# EAGLE board tascud ver01 (EAGLE 8.1.0)
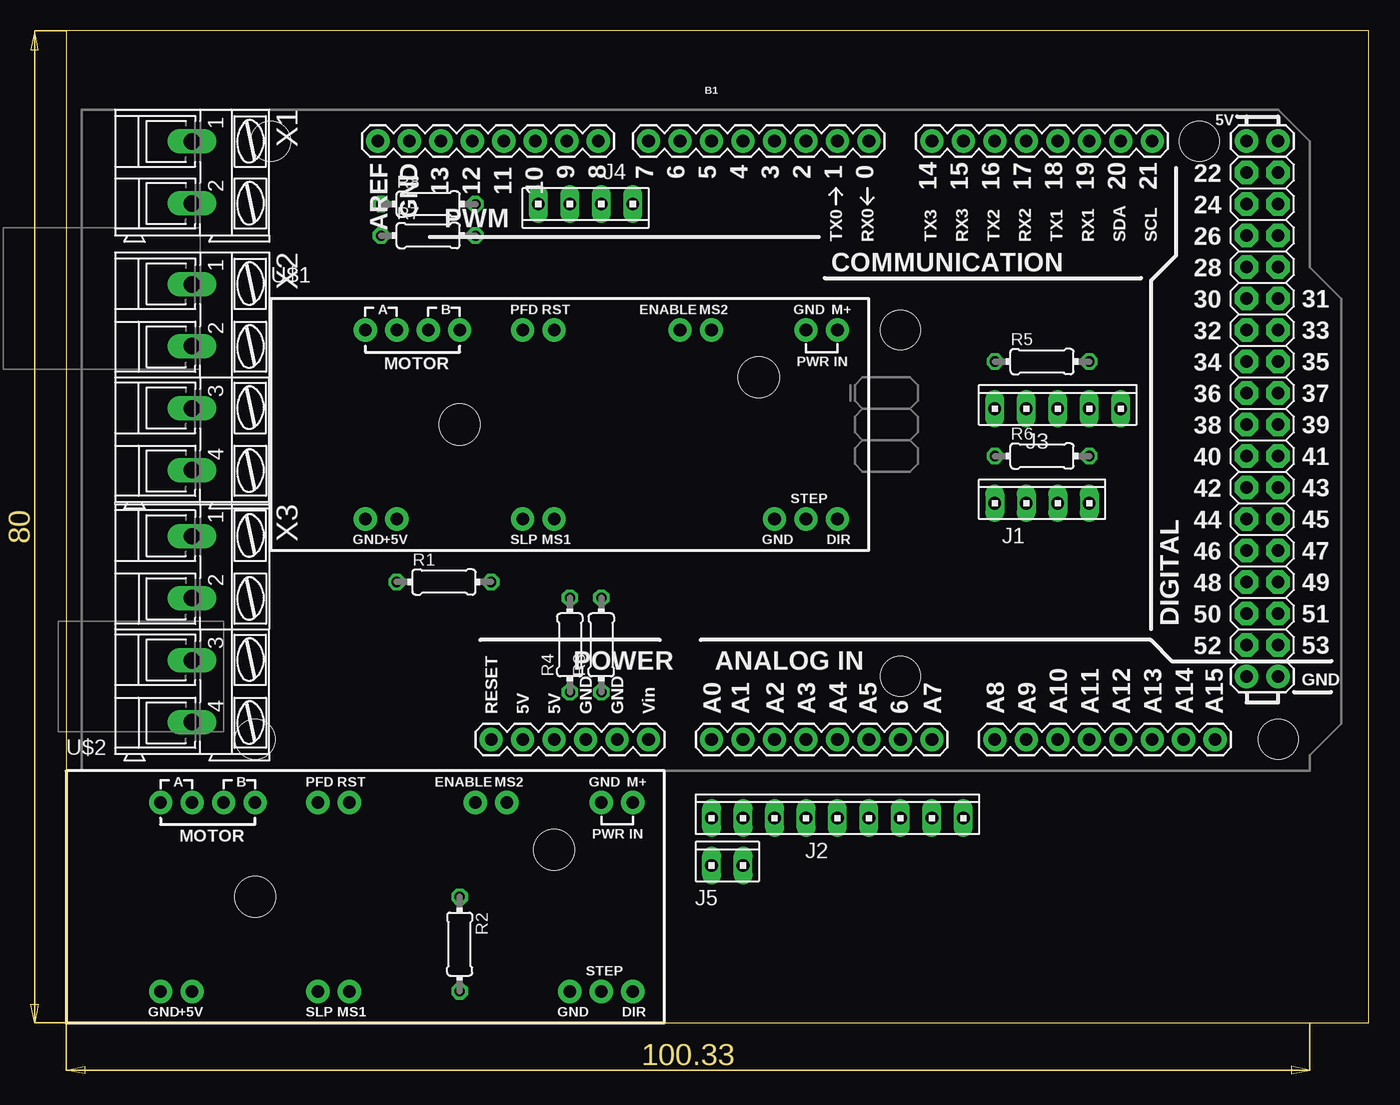
[diagram p0: board, top side]
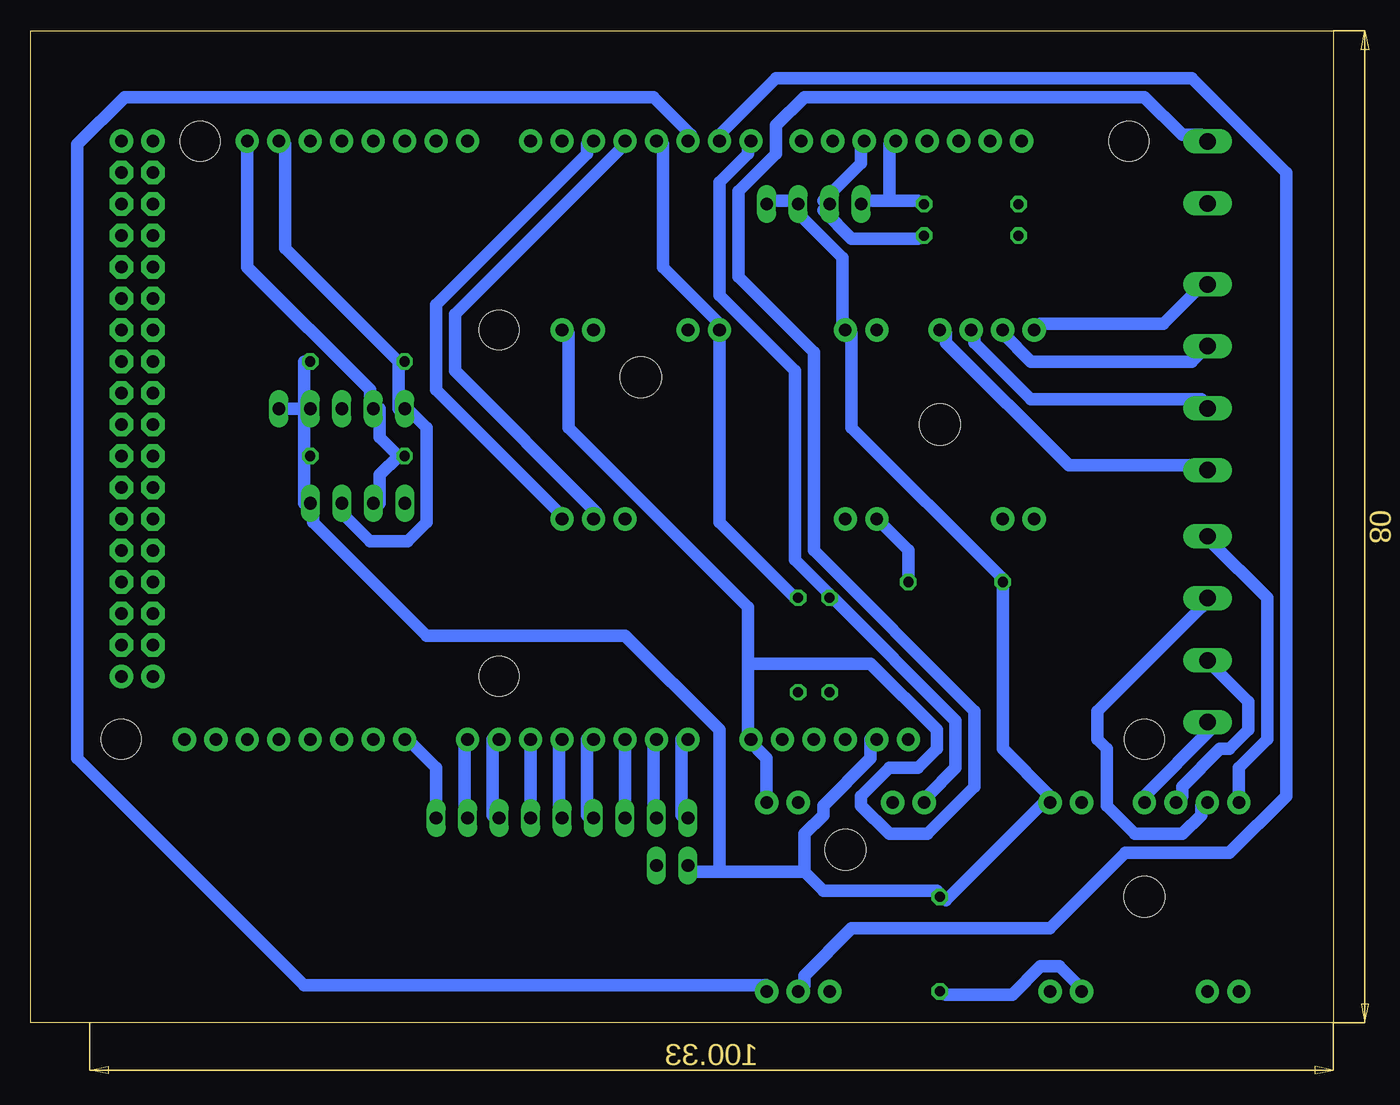
[diagram p1: board, bottom side, seen from below]

Size 105.08 x 80 mm. Coordinates in mm from the lower left corner, seen from the top.
Outline: 0,0 105.08,0 105.08,80 0,80 0,0
Copper layers (1*16): Top 0.035mm / dielectric 1.5mm / Bottom 0.035mm
Design rules "default *": minimum track width 40mil, minimum drill 24mil, track to track 20mil, track to pad 20mil, pad to pad 20mil, via to via 20mil, smd to smd 8mil, copper to edge 40mil, drill to drill 8mil, minimum pad ring 10mil, minimum via ring 8mil, stop-mask expansion 4mil, vias tented up to drill 0mil, thermal gap 10mil
Net classes: 0 default: width 0.635 mm, drill 0.381 mm, clearance 0.305 mm

## Footprints (pad centres in the part's own frame; a part is rotated, then mirrored left to right if it is on the bottom)
ARDUINO_MEGA = drill 1.016 pad 1.88: 0 13.97,24.13; 1 11.43,24.13; 2 8.89,24.13; 3 6.35,24.13; 3.3V -13.97,-24.13; 4 3.81,24.13; 5 1.27,24.13; 5V@0 -11.43,-24.13; 5V@1 44.45,24.13; 5V@2 46.99,24.13; 6 -1.27,24.13; 7 -3.81,24.13; 8 -7.874,24.13; 9 -10.414,24.13; 10 -12.954,24.13; 11 -15.494,24.13; 12 -18.034,24.13; 13 -20.574,24.13; 14 19.05,24.13; 15 21.59,24.13; 16 24.13,24.13; 17 26.67,24.13; 18 29.21,24.13; 19 31.75,24.13; 20 34.29,24.13; 21 36.83,24.13; A0 1.27,-24.13; A1 3.81,-24.13; A2 6.35,-24.13; A3 8.89,-24.13; A4 11.43,-24.13; A5 13.97,-24.13; A6 16.51,-24.13; A7 19.05,-24.13; A8 24.13,-24.13; A9 26.67,-24.13; A10 29.21,-24.13; A11 31.75,-24.13; A12 34.29,-24.13; A13 36.83,-24.13; A14 39.37,-24.13; A15 41.91,-24.13; AREF -25.654,24.13; GND@0 -8.89,-24.13; GND@1 -6.35,-24.13; GND@2 44.45,-19.05; GND@3 46.99,-19.05; GND@4 -23.114,24.13; RESET -16.51,-24.13; VIN -3.81,-24.13 | drill 1.016 pad 1.88 octagon: 22 44.45,21.59; 23 46.99,21.59; 24 44.45,19.05; 25 46.99,19.05; 26 44.45,16.51; 27 46.99,16.51; 28 44.45,13.97; 29 46.99,13.97; 30 44.45,11.43; 31 46.99,11.43; 32 44.45,8.89; 33 46.99,8.89; 34 44.45,6.35; 35 46.99,6.35; 36 44.45,3.81; 37 46.99,3.81; 38 44.45,1.27; 39 46.99,1.27; 40 44.45,-1.27; 41 46.99,-1.27; 42 44.45,-3.81; 43 46.99,-3.81; 44 44.45,-6.35; 45 46.99,-6.35; 46 44.45,-8.89; 47 46.99,-8.89; 48 44.45,-11.43; 49 46.99,-11.43; 50 44.45,-13.97; 51 46.99,-13.97; 52 44.45,-16.51; 53 46.99,-16.51 | hole 3.2: -34.29,24.13; -35.56,-24.13; 16.51,8.89; 16.51,-19.05; 40.64,24.13; 46.99,-24.13
10X04MTA = drill 1.016 long: 1 3.81,0; 2 1.27,0; 3 -1.27,0; 4 -3.81,0
10X09MTA = drill 1.016 long: 1 10.16,0; 2 7.62,0; 3 5.08,0; 4 2.54,0; 5 0,0; 6 -2.54,0; 7 -5.08,0; 8 -7.62,0; 9 -10.16,0
10X05MTA = drill 1.016 long: 1 5.08,0; 2 2.54,0; 3 0,0; 4 -2.54,0; 5 -5.08,0
10X02MTA = drill 1.016 long: 1 1.27,0; 2 -1.27,0
0204/7 = drill 0.813 octagon: 1 -3.81,0; 2 3.81,0
EASYDRIVER_V44 = drill 1.016 pad 1.88: A1 -16.51,7.62; A2 -13.97,7.62; B1 -8.89,7.62; B2 -11.43,7.62; DIR 21.59,-7.62; ENABLE 8.89,7.62; GND1 19.05,7.62; GND2 16.51,-7.62; GND3 -16.51,-7.62; M+ 21.59,7.62; MS1 -1.27,-7.62; MS2 11.43,7.62; P$11 -13.97,-7.62; PFD -3.81,7.62; RST -1.27,7.62; SLEEP -3.81,-7.62; STEP 19.05,-7.62 | hole 3.302: 15.24,3.81; -8.89,0
AK300/2 = drill 1.321 long: 1 -2.515,0; 2 2.489,0
AK300/4 = drill 1.321 long: 1 -7.493,0; 2 -2.515,0; 3 2.515,0; 4 7.493,0

## Placement (x,y rotation side)
B1  ARDUINO_MEGA_R3FULL  [ARDUINO_MEGA]  50.8,46.99 0 top
J1  [10X04MTA]  78.74,41.91 0 top
J2  [10X09MTA]  62.23,16.51 0 top
J3  [10X05MTA]  80.01,49.53 0 top
J4  [10X04MTA]  41.91,66.04 180 top
J5  [10X02MTA]  53.34,12.7 0 top
R1  1k  [0204/7]  30.48,35.56 0 top
R2  1k  [0204/7]  31.75,6.35 270 top
R3  1k  [0204/7]  43.18,30.48 90 top
R4  1k  [0204/7]  40.64,30.48 90 top
R5  1k  [0204/7]  78.74,53.34 0 top
R6  1k  [0204/7]  78.74,45.72 0 top
R7  1k  [0204/7]  29.21,63.5 0 top
R8  1k  [0204/7]  29.21,66.04 0 top
U$1  EASYDRIVER_V44  [EASYDRIVER_V44]  40.64,48.26 0 top
U$2  EASYDRIVER_V44  [EASYDRIVER_V44]  24.13,10.16 0 top
X1  [AK300/2]  10.16,68.58 270 top
X2  [AK300/4]  10.16,52.07 270 top
X3  [AK300/4]  10.16,31.75 270 top

## Library data of the parts
B1 = SparkFun-Boards
J1-J5 = con-amp
R1-R8 = rcl
U$1 U$2 = EasyDriver
X1-X3 = con-ptr500; OC_FARNELL: unknown; OC_NEWARK: unknown

## Nets
3.3V: B1.3.3V J1.1 J3.1 J3.2 J4.3 J4.4 J5.2 R1.1 R2.1 R5.2 R6.2 U$1.RST U$2.RST
12V: B1.VIN U$1.M+ U$2.M+ X1.1
N$1: B1.2 U$1.DIR
N$2: U$2.MS2
N$3: B1.4 R3.2 U$1.ENABLE
N$4: B1.5 U$2.DIR
N$5: B1.6 U$2.STEP
N$6: B1.7 R4.2 U$2.ENABLE
N$7: B1.A1 J2.8
N$8: B1.A2 J2.7
N$9: U$1.A1 X2.1
N$10: U$1.A2 X2.2
N$11: U$1.B2 X2.3
N$12: U$1.B1 X2.4
N$13: U$2.A1 X3.1
N$14: U$2.A2 X3.2
N$15: U$2.B2 X3.3
N$16: U$2.B1 X3.4
N$17: B1.3 U$1.STEP
N$18: B1.A7 J2.2
N$19: R2.2 U$2.SLEEP
N$20: R1.2 U$1.SLEEP
N$21: B1.A3 J2.6
N$22: B1.11 J4.1 R8.2
N$23: B1.A8 J2.1
N$24: B1.A4 J2.5
N$25: B1.A5 J2.4
N$26: B1.A0 J2.9
N$27: B1.A6 J2.3
N$28: U$2.GND1
N$36: B1.10 J4.2 R7.2
SCL: B1.21 J1.3 J3.4 R6.1
SDA: B1.20 J1.2 J3.5 R5.1

## Tracks (layer width: path | path; a pad name or v marks a point on that pad's centre or on a via)
3.3V
  Bottom 1.016: J4.4 45.72,66.29 43.43,66.29 J4.3 43.43,65.53 39.62,61.72 39.62,56.39 U$1.RST 38.86,55.63 38.86,48.01 26.67,35.81 R1.1 26.67,22.1 22.86,18.29 | 83.06,49.53 83.06,45.72 | 83.06,49.53 83.06,53.34 R5.2 | 83.06,45.72 83.06,41.91 J1.1 82.3,41.91 82.3,40.39 73.15,31.24 57.15,31.24 49.53,23.62 49.53,12.19 | 83.06,45.72 R6.2 | 83.06,49.53 J3.1 | 83.06,49.53 J3.2 | 22.86,18.29 31.24,9.91 R2.1 32,10.67 41.15,10.67 42.67,12.19 | 22.86,18.29 U$2.RST | 42.67,12.19 49.53,12.19 | 49.53,12.19 51.82,12.19 J5.2 | 42.67,12.19 42.67,15.24 41.15,16.76 41.15,17.53 37.34,21.34 37.34,22.86 B1.3.3V
12V
  Bottom 1.016: U$2.M+ 45.72,21.34 47.24,22.86 | 47.24,22.86 47.24,28.96 | 47.24,28.96 47.24,33.53 61.72,48.01 61.72,55.63 U$1.M+ | 47.24,22.86 B1.VIN | 47.24,28.96 37.34,28.96 32,23.62 32,22.1 33.53,20.57 35.81,20.57 38.1,18.29 38.1,17.53 35.81,15.24 32.77,15.24 28.96,19.05 28.96,25.15 41.91,38.1 41.91,54.1 48.01,60.2 48.01,67.06 44.96,70.1 44.96,72.39 42.67,74.68 15.24,74.68 12.19,71.63 10.67,71.63 X1.1
N$1
  Bottom 1.016: B1.2 60.2,70.87 60.2,70.1 72.39,57.91 72.39,51.05 62.48,41.15 U$1.DIR
N$3
  Bottom 1.016: R3.2 43.43,34.29 49.53,40.39 U$1.ENABLE 49.53,56.39 54.1,60.96 54.1,70.87 B1.4
N$4
  Bottom 1.016: U$2.DIR 45.72,3.05 83.06,3.05 101.35,21.34 101.35,70.87 97.54,74.68 54.86,74.68 51.82,71.63 B1.5
N$5
  Bottom 1.016: U$2.STEP 42.67,3.05 42.67,3.81 38.86,7.62 22.86,7.62 16.76,13.72 8.38,13.72 3.81,18.29 3.81,68.58 11.43,76.2 44.96,76.2 49.53,71.63 B1.6
N$6
  Bottom 1.016: 40.39,34.29 30.48,24.38 30.48,20.57 32.77,18.29 U$2.ENABLE | 40.39,34.29 43.43,37.34 43.43,52.58 49.53,58.67 49.53,67.82 47.24,70.1 47.24,70.87 B1.7 | 40.39,34.29 R4.2
N$7
  Bottom 1.016: J2.8 54.86,16.76 54.86,22.86 B1.A1
N$8
  Bottom 1.016: B1.A2 J2.7
N$9
  Bottom 1.016: U$1.A1 23.62,56.39 13.72,56.39 10.67,59.44 X2.1
N$10
  Bottom 1.016: U$1.A2 26.67,55.63 24.38,53.34 11.43,53.34 10.67,54.1 X2.2
N$11
  Bottom 1.016: U$1.B2 28.96,55.63 28.96,54.86 24.38,50.29 10.67,50.29 X2.3
N$12
  Bottom 1.016: U$1.B1 31.24,55.63 31.24,54.86 21.34,44.96 10.67,44.96 X2.4
N$13
  Bottom 1.016: U$2.A1 7.62,20.57 5.33,22.86 5.33,34.29 9.91,38.86 X3.1
N$14
  Bottom 1.016: U$2.A2 10.67,17.53 10.67,16.76 12.19,15.24 16,15.24 18.29,17.53 18.29,22.1 19.05,22.86 19.05,25.15 10.67,33.53 X3.2
N$15
  Bottom 1.016: U$2.B2 12.19,18.29 12.19,19.05 9.14,22.1 8.38,22.1 6.86,23.62 6.86,25.91 9.91,28.96 X3.3
N$16
  Bottom 1.016: U$2.B1 15.24,18.29 9.91,23.62 X3.4
N$17
  Bottom 1.016: B1.3 57.15,70.87 70.87,57.15 70.87,52.58 59.44,41.15 U$1.STEP
N$18
  Bottom 1.016: J2.2 70.1,16.76 70.1,22.86 B1.A7
N$19
  Bottom 1.016: R2.2 31.24,2.29 25.91,2.29 23.62,4.57 22.1,4.57 20.57,3.05 U$2.SLEEP
N$20
  Bottom 1.016: R1.2 34.29,38.1 U$1.SLEEP
N$21
  Bottom 1.016: J2.6 60.2,16.76 60.2,22.86 B1.A3
N$22
  Bottom 1.016: 35.81,66.29 38.1,66.29 J4.1 | 35.81,66.29 33.53,66.29 R8.2 | 35.81,66.29 35.81,70.87 B1.11
N$23
  Bottom 1.016: J2.1 72.39,20.57 74.68,22.86 B1.A8
N$24
  Bottom 1.016: J2.5 62.48,16.76 62.48,22.86 B1.A4
N$25
  Bottom 1.016: B1.A5 J2.4
N$26
  Bottom 1.016: J2.9 52.58,16.76 52.58,22.86 B1.A0
N$27
  Bottom 1.016: J2.3 67.82,16.76 67.82,22.86 B1.A6
N$36
  Bottom 1.016: R7.2 33.53,63.25 38.86,63.25 41.15,65.53 J4.2 41.15,66.29 38.1,69.34 38.1,70.87 B1.10
SCL
  Bottom 1.016: 75.44,45.72 76.96,47.24 76.96,49.53 J3.4 77.72,49.53 77.72,51.05 87.63,60.96 B1.21 | 75.44,45.72 76.96,44.2 76.96,41.91 J1.3 | 75.44,45.72 R6.1
SDA
  Bottom 1.016: 75.44,53.34 75.44,49.53 J3.5 74.68,49.53 73.15,48.01 73.15,40.39 74.68,38.86 77.72,38.86 80.01,41.15 J1.2 | 75.44,53.34 84.58,62.48 84.58,70.87 B1.20 | 75.44,53.34 R5.1